# Altium PCB RS485_M_V1.PcbDoc
Units mm, origin at the board's own origin, x right, y up, seen from the top; angles counter-clockwise.
Board outline 13.93 x 19 mm, 2 copper layers (Top Layer, Bottom Layer); 12 components, 14 nets, 54 pads, 15 vias.
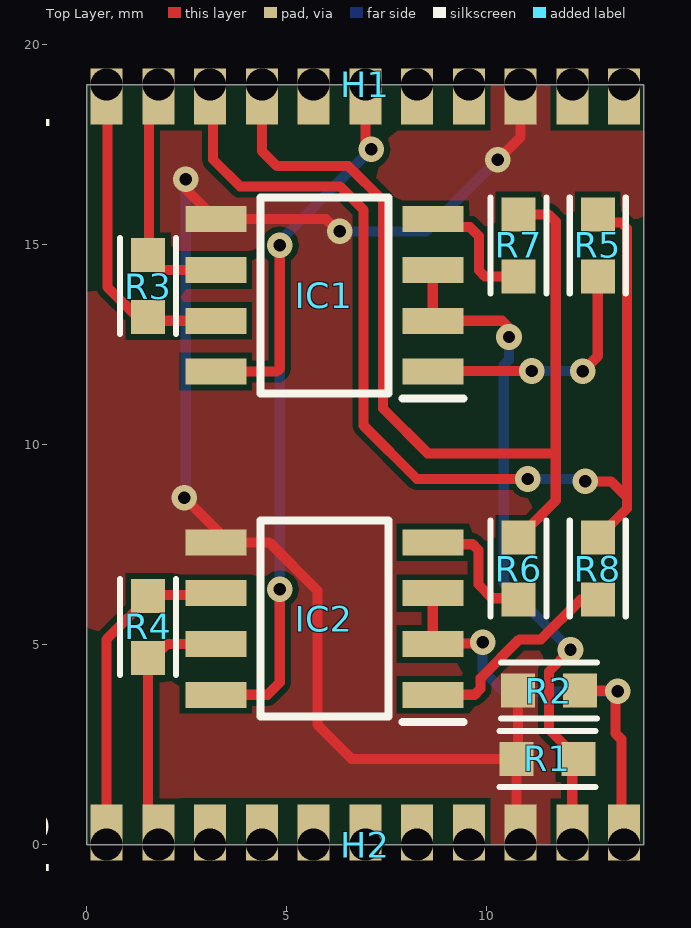
[diagram p0: Top Layer view]
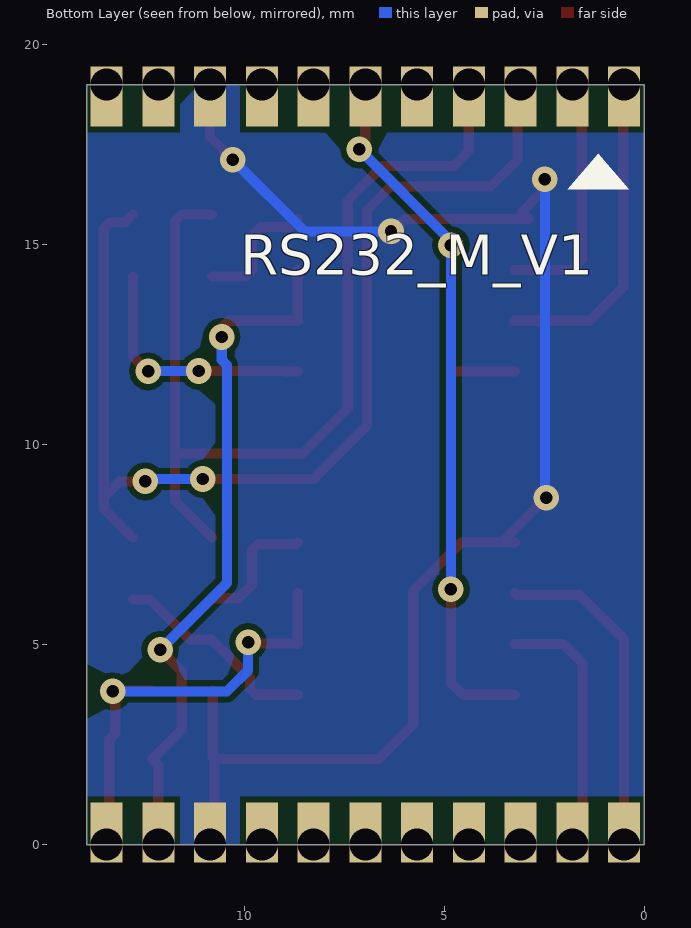
[diagram p1: Bottom Layer view, seen from below]
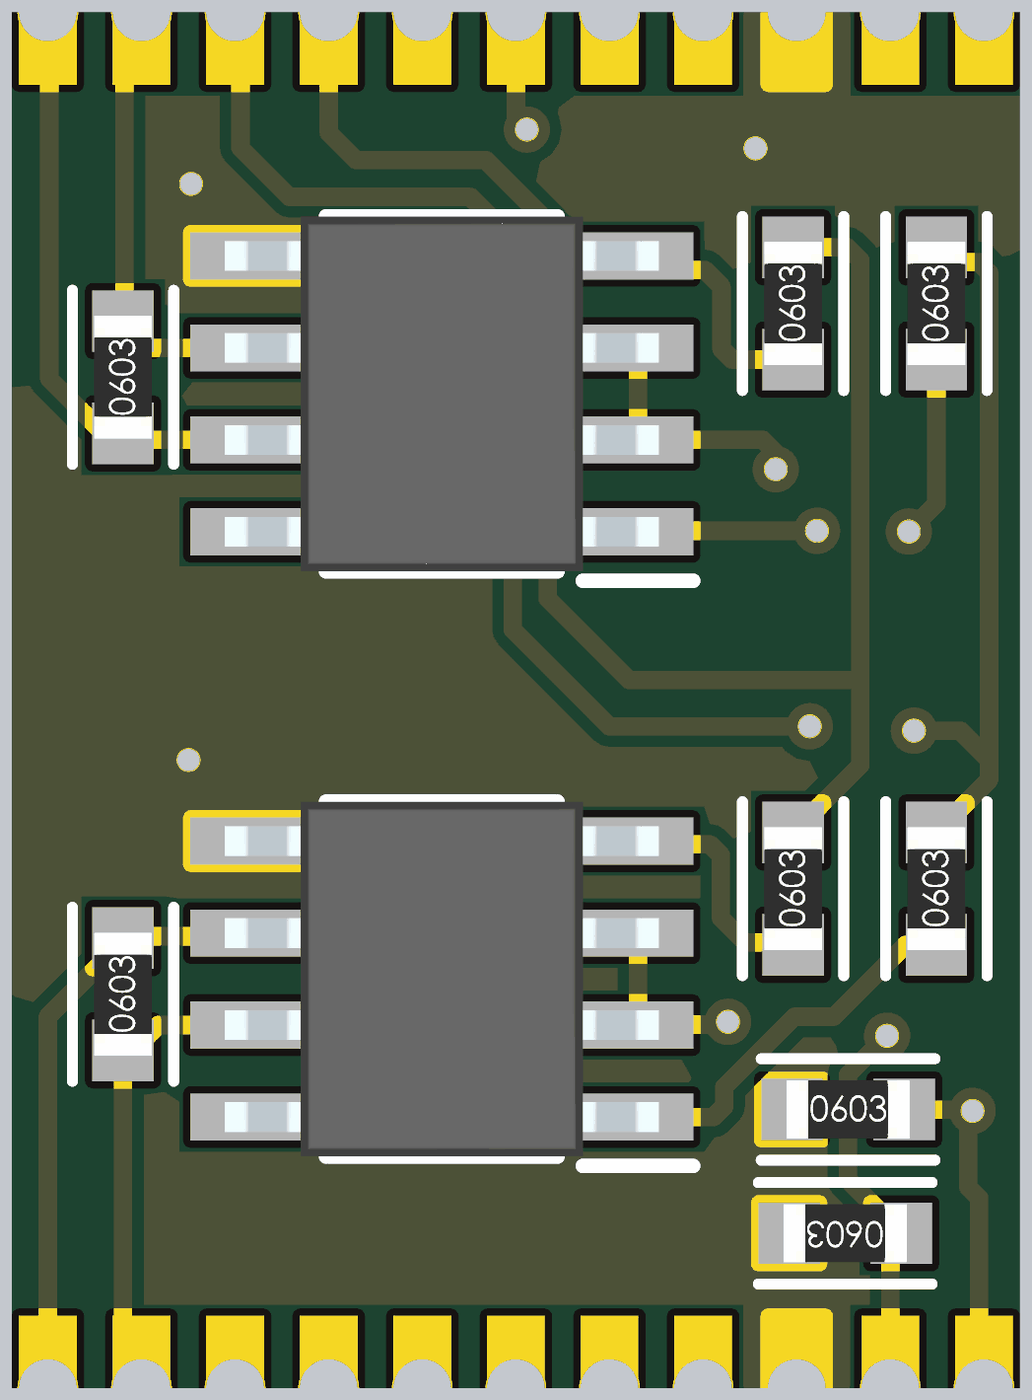
[diagram p2: 3D render of the assembled board from above, using the file's embedded part models]

## Layer stack, top to bottom
Top Solder: solder mask 0.0102, Solder Resist, Dk 3.5
Top Layer: signal copper 0.0356
Dielectric 1: dielectric 0.32, FR-4, Dk 4.8
Bottom Layer: signal copper 0.0356
Bottom Solder: solder mask 0.0102, Solder Resist, Dk 3.5

## Board outline
0,0 0,19 13.934,19 13.934,0

## Design rules (kind name [scope] priority, off if disabled: settings)
AssemblyTestPointUsage SilkToBoardRegionClearance_1 [All] p2:
AssemblyTestPointUsage SilkToBoardRegionClearance [All] p3:
Clearance [All] p1: gap=0.152 ignorepadtopadclearanceinfootprint=FALSE except(0: Arc-Hole Track-Hole SMDPad-Hole THPad-Hole Via-Hole Fill-Hole Poly-Hole Region-Hole Text-Hole)
HoleSize [All] p1: absolutevalues=TRUE maxlimit=6.35 minlimit=0.3 maxpercent=80.000 minpercent=20.000
MatchedLengths DiffPair_DIFF100MatchedLengths [InDifferentialPairClass('DIFF100')] p1: tolerance=0.152 checknetsindiffpair=TRUE checkdiffpairvsdiffpair=FALSE checkxsignals=FALSE checkothers=FALSE usedelayunits=FALSE
MinimumSolderMaskSliver [All] p1: minsoldermaskwidth=0.1
MinimumSolderMaskSliver SilkscreenOverComponentPads_2 [All] p2: minsoldermaskwidth=0.254
MinimumSolderMaskSliver SilkToSolderMaskClearance_1 [IsPad] p3: minsoldermaskwidth=0.254
MinimumSolderMaskSliver SilkscreenOverComponentPads_1 [All] p4: minsoldermaskwidth=0.254
MinimumSolderMaskSliver SilkToSolderMaskClearance [IsPad] p5: minsoldermaskwidth=0.254
MinimumSolderMaskSliver SilkscreenOverComponentPads [All] p6: minsoldermaskwidth=0.254
PolygonConnect [All] p1: connectstyle=Direct reliefconductorwidth=0.254 reliefentries=4 polygonreliefangle="90 Angle" airgapwidth=0.254
RoomDefinition RS485_M_V1 [InComponentClass('RS485_M_V1')] p1: confinementstyle=ConfineIn formatcopy=TRUE lockcomponents=FALSE outline -0.13,-0.63 14.12,-0.63 14.12,19.59 -0.13,19.59
RoutingVias [All] p1: holewidth=0.305 width=0.635 viastyle="Through Hole" minholewidth=0.305 minwidth=0.635 maxholewidth=0.711 maxwidth=1.27
SilkToBoardRegionClearance SilkToBoardRegionClearance_2 [All] p1:
SilkToSolderMaskClearance SilkToSolderMaskClearance_2 [IsPad] p1: minsilkscreentomaskgap=0.254 clearancetoexposedcopper=TRUE
SolderMaskExpansion [All] p1: expansion=0.102
Width [All] p1: maxlimit=2.54 minlimit=0.152 preferedwidth=0.254
26 further rules are at their usual default settings.

## Components (designator, comment, footprint, x,y, rotation, side; value= is the part's Value field where it differs from the comment)
H1 "CASTELLATED 11 pin" "CASTELLATED 11 pin" 13.438,19 r180 top locked
H2 "CASTELLATED 11 pin" "CASTELLATED 11 pin" 0.5,0 r0 top locked
IC1 "ST3485EBDR" SOIC127P600X175-8N 5.945,13.73 r180 top
IC2 "ST3485EBDR" SOIC127P600X175-8N 5.945,5.65 r180 top
R1 "10k" SMD-0603-RES 11.52,2.14 r90 top
R2 "10k" SMD-0603-RES 11.56,3.85 r270 top
R3 "120" SMD-0603-RES 1.54,13.96 r0 top
R4 "120" SMD-0603-RES 1.54,5.44 r0 top
R5 "33" SMD-0603-RES 12.78,14.978 r0 top
R6 "33" SMD-0603-RES 10.8,6.898 r0 top
R7 "33" SMD-0603-RES 10.8,14.978 r0 top
R8 "33" SMD-0603-RES 12.78,6.898 r0 top

## Footprints (in the part's own frame and the unit in brackets; to place one, negate y for a bottom-side part, rotate by r counter-clockwise, add the part's x,y. Pads: shape width x height; smd on the part's side, far side on the other; paste and mask are expansions set on the pad)
"CASTELLATED 11 pin" [mm]
  rect 0.8x1.4 / inner rect 0.8x1.5 / far side rect 0.8x1.5 hole 0.8 copper offset 0,0.3: 1(0,0) 2(1.294,0) 3(2.587,0) 4(3.881,0) 5(5.175,0) 6(6.469,0) 7(7.762,0) 8(9.056,0) 9(10.35,0) 10(11.644,0) 11(12.938,0)
SMD-0603-RES [mm]
  rect 0.85x0.85 smd: 1(0,0.775) 2(0,-0.775)
  silkscreen extent -0.7,-1.2 0.7,1.2, body extent -0.4,-0.85 0.4,0.85, height 0.56
SOIC127P600X175-8N [mm]
  rect 1.525x0.65 smd: 1(-2.712,1.905) 2(-2.712,0.635) 3(-2.712,-0.635) 4(-2.712,-1.905) 5(2.712,-1.905) 6(2.712,-0.635) 7(2.712,0.635) 8(2.712,1.905)
  silkscreen extent -3.47,-2.45 1.6,2.58, body extent -3,-2.45 3,2.45, height 1.75

## Part data
IC1 IC2: "Integrated Circuit", Manufacturer_Name=STMicroelectronics, Mouser2 Part Number=511-ST3485EBDR, Datasheet Link=https://componentsearchengine.com/Datasheets/1/ST3485EBDR.pdf, Height=1.75mm, Manufacturer_Part_Number=ST3485EBDR, Mouser2 Price/Stock=https://www.mouser.com/Search/Refine.aspx?Keyword=511-ST3485EBDR, Supplier 1=Mouser, Supplier Part Number 1=511-ST3485EBDR
R1 R2: library part ERJ-3EKF1002V, "RES SMD 10K OHM 1% 1/10W 0603", Digi-Key Part Number=P10.0KHCT-ND, Manufacturer="Panasonic Electronic Components", Operating Temperature="-55°C ~ 155°C", Package / Case="0603 (1608 Metric)", Power (Watts)="0.1W, 1/10W", Supplier Device Package=0603, Supplier Part Number 1=667-ERJ-3EKF1002V, Temperature Coefficient=±100ppm/°C, Tolerance=±1%, @ qty=1500, Composition="Thick Film", Datasheets=http://industrial.panasonic.com/www-cgi/jvcr13pz.cgi?E+PZ+3+AOA0002+ERJ3EKF1002V+7+WW, Factory Stock=0, Failure Rate=-, Features="Automotive AEC-Q200", Height - Seated (Max)="0.022\" (0.55mm)", Image=//media.digikey.com/Photos/Panasonic%20Photos/MFG_ERJ-P6W%20Series.jpg, Minimum Quantity=1, Number of Terminations=2, Packaging="Cut Tape (CT)", Part Number=ERJ-3EKF1002V, Part Status=Active, Quantity Available=6703141, Series=ERJ, Size / Dimension="0.063\" L x 0.031\" W (1.60mm x 0.80mm)", Supplier 1=Mouser, Unit Price (USD)=0.00379
R3 R4: library part ERJ-3EKF1200V, "RES SMD 120 OHM 1% 1/10W 0603", Digi-Key Part Number=P120HCT-ND, Manufacturer="Panasonic Electronic Components", Operating Temperature="-55°C ~ 155°C", Package / Case="0603 (1608 Metric)", Power (Watts)="0.1W, 1/10W", Supplier Device Package=0603, Supplier Part Number 1=667-ERJ-3EKF1200V, Temperature Coefficient=±100ppm/°C, Tolerance=±1%, @ qty=1500, Composition="Thick Film", Datasheets=http://industrial.panasonic.com/www-cgi/jvcr13pz.cgi?E+PZ+3+AOA0002+ERJ3EKF1200V+7+WW, Factory Stock=0, Failure Rate=-, Features="Automotive AEC-Q200", Height - Seated (Max)="0.022\" (0.55mm)", Image=//media.digikey.com/Photos/Panasonic%20Photos/MFG_ERJ-P6W%20Series.jpg, Minimum Quantity=1, Number of Terminations=2, Packaging="Cut Tape (CT)", Part Number=ERJ-3EKF1200V, Part Status=Active, Quantity Available=84623, Series=ERJ, Size / Dimension="0.063\" L x 0.031\" W (1.60mm x 0.80mm)", Supplier 1=Mouser, Unit Price (USD)=0.00379
R5 R6 R7 R8: library part ERJ-3EKF33R0V, "RES SMD 33 OHM 1% 1/10W 0603", Digi-Key Part Number=P33.0HCT-ND, Manufacturer="Panasonic Electronic Components", Operating Temperature="-55°C ~ 155°C", Package / Case="0603 (1608 Metric)", Power (Watts)="0.1W, 1/10W", Supplier Device Package=0603, Supplier Part Number 1=667-ERJ-3EKF33R0V, Temperature Coefficient=±100ppm/°C, Tolerance=±1%, @ qty=1500, Composition="Thick Film", Datasheets=http://industrial.panasonic.com/www-cgi/jvcr13pz.cgi?E+PZ+3+AOA0002+ERJ3EKF33R0V+7+WW, Factory Stock=0, Failure Rate=-, Features="Automotive AEC-Q200", Height - Seated (Max)="0.022\" (0.55mm)", Image=//media.digikey.com/Photos/Panasonic%20Photos/MFG_ERJ-P6W%20Series.jpg, Minimum Quantity=1, Number of Terminations=2, Packaging="Cut Tape (CT)", Part Number=ERJ-3EKF33R0V, Part Status=Active, Quantity Available=1306721, Series=ERJ, Size / Dimension="0.063\" L x 0.031\" W (1.60mm x 0.80mm)", Supplier 1=Mouser, Unit Price (USD)=0.00379

## Via types
v1: diameter 0.64, hole 0.31, Top Layer to Bottom Layer, tented both sides, 15 vias

## Nets (pads, with @x,y where several pads share a name; then routed paths per layer and width w, separated by ;. In a path a pad name is that pad's centre, name@x,y a point inside that pad or via, vN(x,y) a via of type N, cw(c..) or ccw(c..) an arc to the next point about the centre after c; other vN are vias at no path point)
A1: H1.10 IC1.6 R3.1 | length 6.2
  Top Layer w0.254: H1.10 1.56,18.766 1.56,14.63 1.825,14.365 IC1.6
A2: H2.1 IC2.6 R4.1 | length 8.3
  Top Layer w0.254: H2.1 0.5,5.13 1.61,6.24 3.188,6.24 IC2.6
B1: H1.11 IC1.7 R3.2 | length 8.1
  Top Layer w0.254: H1.11 0.52,18.98 0.52,13.94 1.365,13.095 IC1.7
B2: H2.2 IC2.7 R4.2 | length 6.5
  Top Layer w0.254: H2.2 1.54,0.254 1.54,4.53 2.025,5.015 IC2.7
D2-1: H2.10 IC1.2 IC1.3 R1.2 | length 17.5
  Top Layer w0.254: IC1.3 IC1.2 10.385,13.095 10.56,12.92 v1(10.56,12.69) ; v1(12.099,4.867) 11.56,4.328 11.56,2.875 R1.2 12.144,1.989 H2.10
  Bottom Layer w0.254: v1(10.56,12.69) 10.56,12.118 10.431,11.988 10.431,6.536 v1(12.099,4.867)
D2-2: H2.11 IC2.2 IC2.3 R2.1 | length 11.7
  Top Layer w0.254: IC2.3 IC2.2 8.664,5.022 9.922,5.022 9.9,5.045 v1(9.9,5.06) ; R2.1 12.34,3.845 13.216,3.845 13.221,3.85 13.221,2.78 13.37,2.631 13.37,0.068 H2.11
  Bottom Layer w0.254: v1(9.9,5.06) 9.9,4.359 10.429,3.83 v1(13.28,3.83)
GND: H1.3 H2.9 IC1.5 IC2.5 R1.1 R2.2 | length 36.8
  Top Layer w0.254: v1(2.445,8.675) 3.46,7.66 IC2.5@3.46,7.555 ; v1(2.48,16.63) 2.48,16.388 3.053,15.815 2.873,15.635 IC1.5 5.985,15.635 6.29,15.33 v1(6.326,15.33) ; IC2.5 IC2.5@3.46,7.555 ; v1(10.28,17.12) 10.851,17.691 H1.3 ; R2.2 10.785,2.18 R1.1 ; H2.9 10.745,0.105 R1.1 ; IC2.5@3.46,7.555 4.565,7.555 5.77,6.35 5.77,3 6.63,2.14 R1.1
  Bottom Layer w0.254: v1(2.445,8.675) 2.48,8.71 v1(2.48,16.63) ; v1(6.326,15.33) 8.49,15.33 v1(10.28,17.12)
NetIC1_1: IC1.1 R5.2 | length 6.3
  Top Layer w0.254: IC1.1 8.975,11.825 8.99,11.84 v1(11.13,11.84) ; v1(12.4,11.83) 12.78,12.21 R5.2
  Bottom Layer w0.254: v1(11.13,11.84) 12.39,11.84 v1(12.4,11.83)
NetIC1_4: IC1.4 R7.2 | length 3.2
  Top Layer w0.254: IC1.4 8.851,15.44 9.58,15.44 9.81,15.21 9.81,14.352 9.959,14.203 R7.2
NetIC2_1: IC2.1 R8.2 | length 5.3
  Top Layer w0.254: IC2.1 9.701,3.745 9.85,3.894 9.85,4.16 10.821,5.131 11.361,5.131 12.353,6.123 R8.2
NetIC2_4: IC2.4 R6.2 | length 3.2
  Top Layer w0.254: IC2.4 8.703,7.509 9.651,7.509 9.8,7.36 9.8,6.5 10.143,6.157 10.766,6.157 R6.2
UART1_1: H1.8 R6.1 R7.1 | length 24.5
  Top Layer w0.254: H1.8 4.382,17.338 4.76,16.96 6.55,16.96 7.41,16.1 7.41,10.9 8.53,9.78 11.729,9.78 ; R6.1 11.729,8.602 11.729,9.78 ; R7.1 11.551,15.753 11.729,15.575 11.729,9.78
UART1_2: H1.9 R5.1 R8.1 | length 27.8
  Top Layer w0.254: H1.9 3.162,18.926 3.162,17.128 3.84,16.45 6.34,16.45 6.926,15.864 6.926,10.474 8.26,9.14 v1(11.03,9.14) ; v1(12.47,9.08) 13.11,9.08 13.51,8.68 ; R8.1 13.51,8.403 13.51,8.68 ; R5.1 12.983,15.55 13.361,15.55 13.51,15.401 13.51,8.68
  Bottom Layer w0.254: v1(11.03,9.14) 12.41,9.14 v1(12.47,9.08)
VCC2: H1.6 IC1.8 IC2.8 | length 22.4
  Top Layer w0.254: IC2.8 4.525,3.745 4.83,4.05 v1(4.83,6.38) ; IC1.8 4.765,11.825 4.83,11.89 v1(4.83,14.98) ; H1.6 6.97,17.531 v1(7.12,17.38)
  Bottom Layer w0.254: v1(4.83,6.38) v1(4.83,14.98) 4.83,15.09 v1(7.12,17.38)
pads on no net: H1.1 H1.2 H1.4 H1.5 H1.7 H2.3 H2.4 H2.5 H2.6 H2.7 H2.8

## Polygon pours and split planes (outlines as drawn)
GND on Bottom Layer "GND_L02_P006" (solid, pour order 6): 0,19 0,0 13.94,0 13.94,19.01 13.93,19.01
no net on Bottom Layer "NONET_L02_P000" (solid, pour order 0): 0.254,18.161
GND on Top Layer "GND_L01_P008" (solid, pour order 8): 0,18.99 0.01,19 13.94,19 13.94,0 0,0

## Silkscreen, mask and mechanical layers (free items; w line width, h text height)
Bottom Overlay:
  region: 1.143,17.272 0.381,16.383 1.905,16.383
  text "RS232_M_V1" at 10.09,14.25 h1
Mechanical 1:
  pour cut-out: 5.339,12.008
  lines w0.2: 13.934,0 13.934,19 ; 13.934,0 0,0 0,19 13.934,19